# Allegro board Circuit for sensors.brd
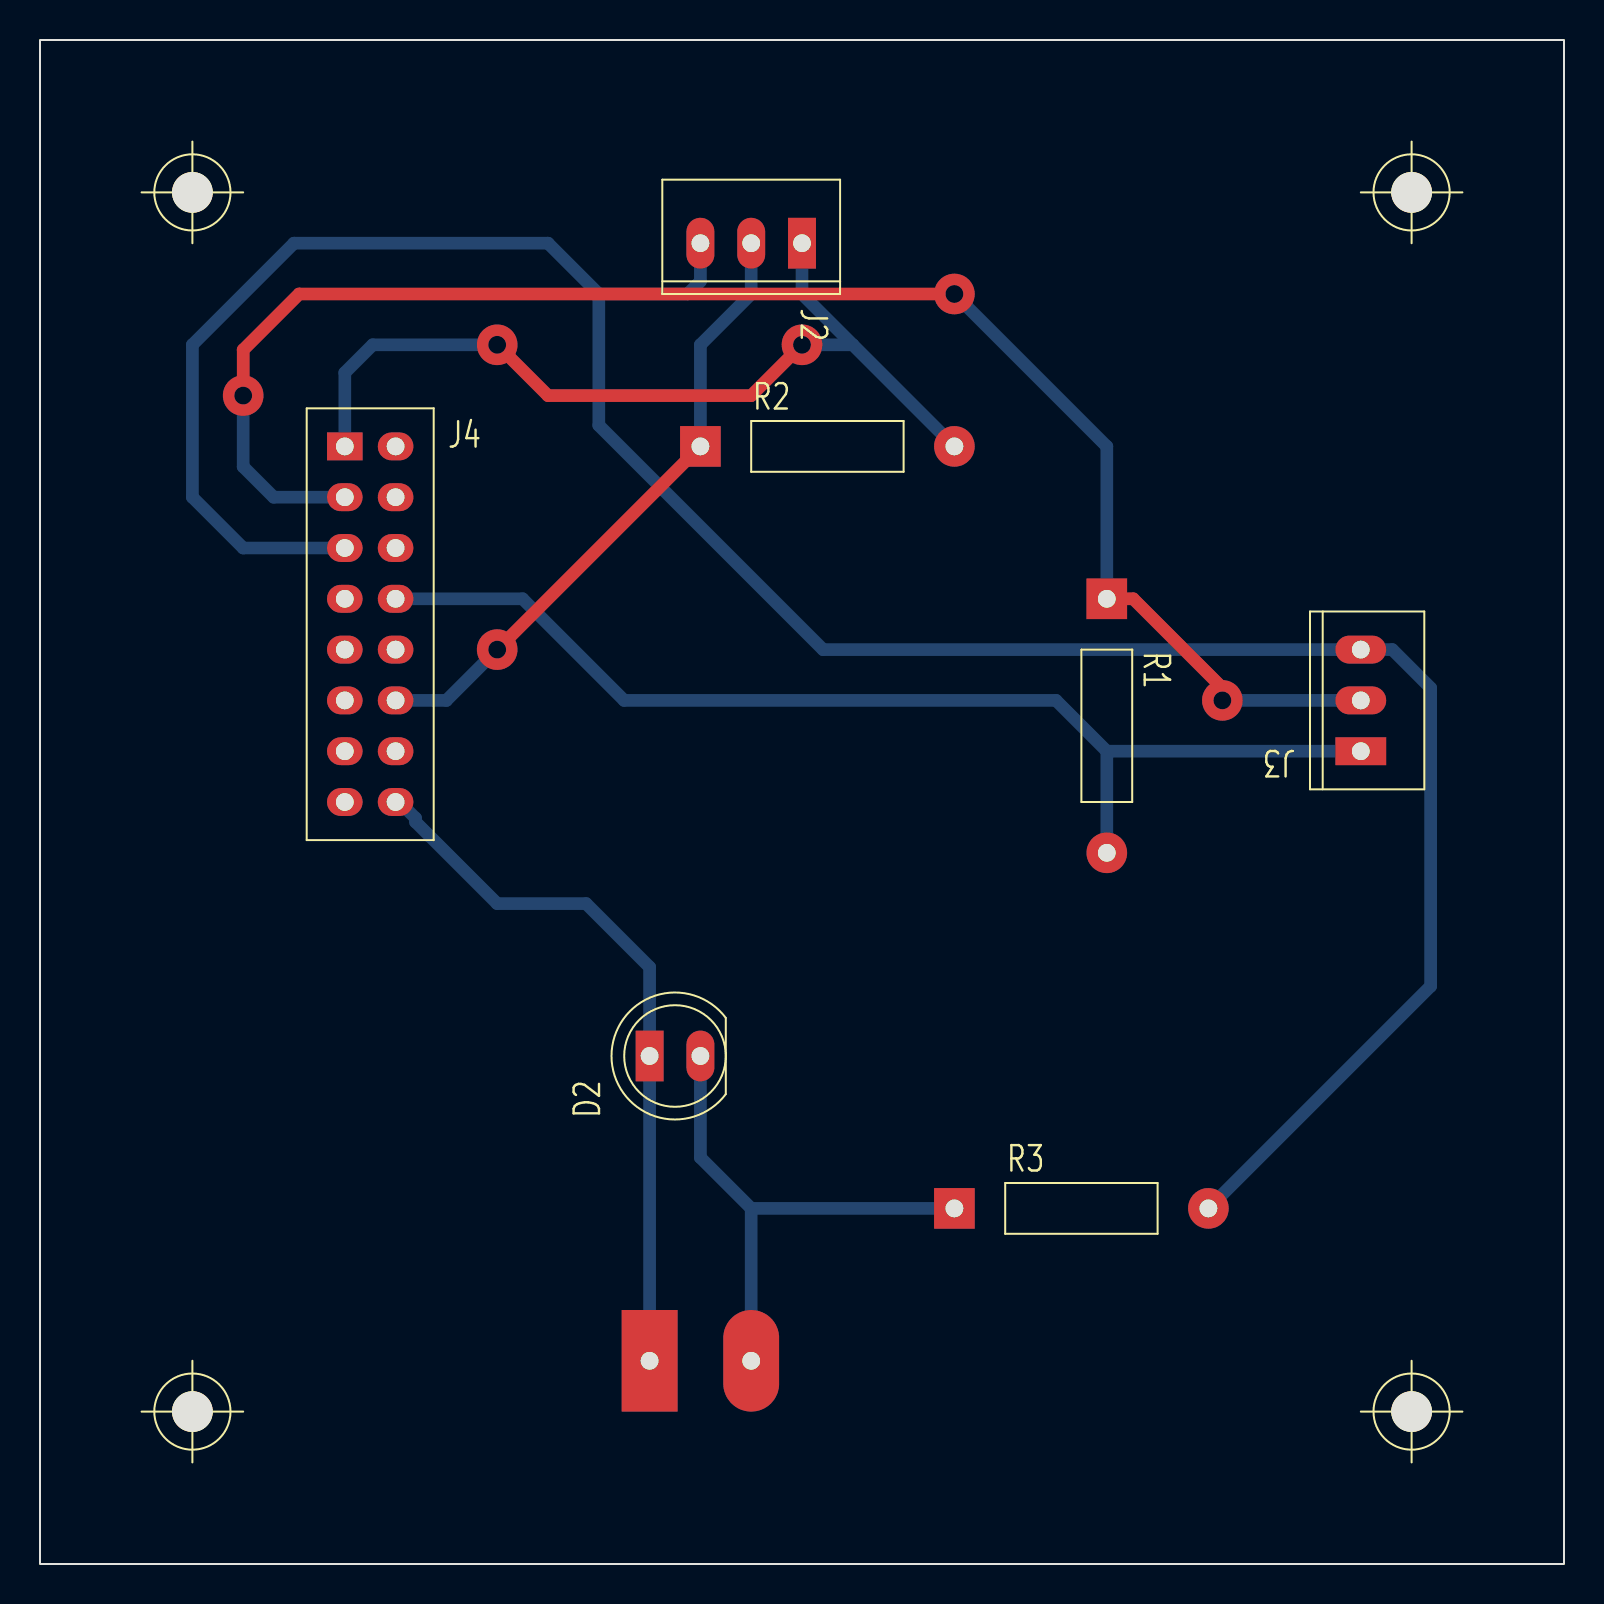
[diagram p0: board, top side]
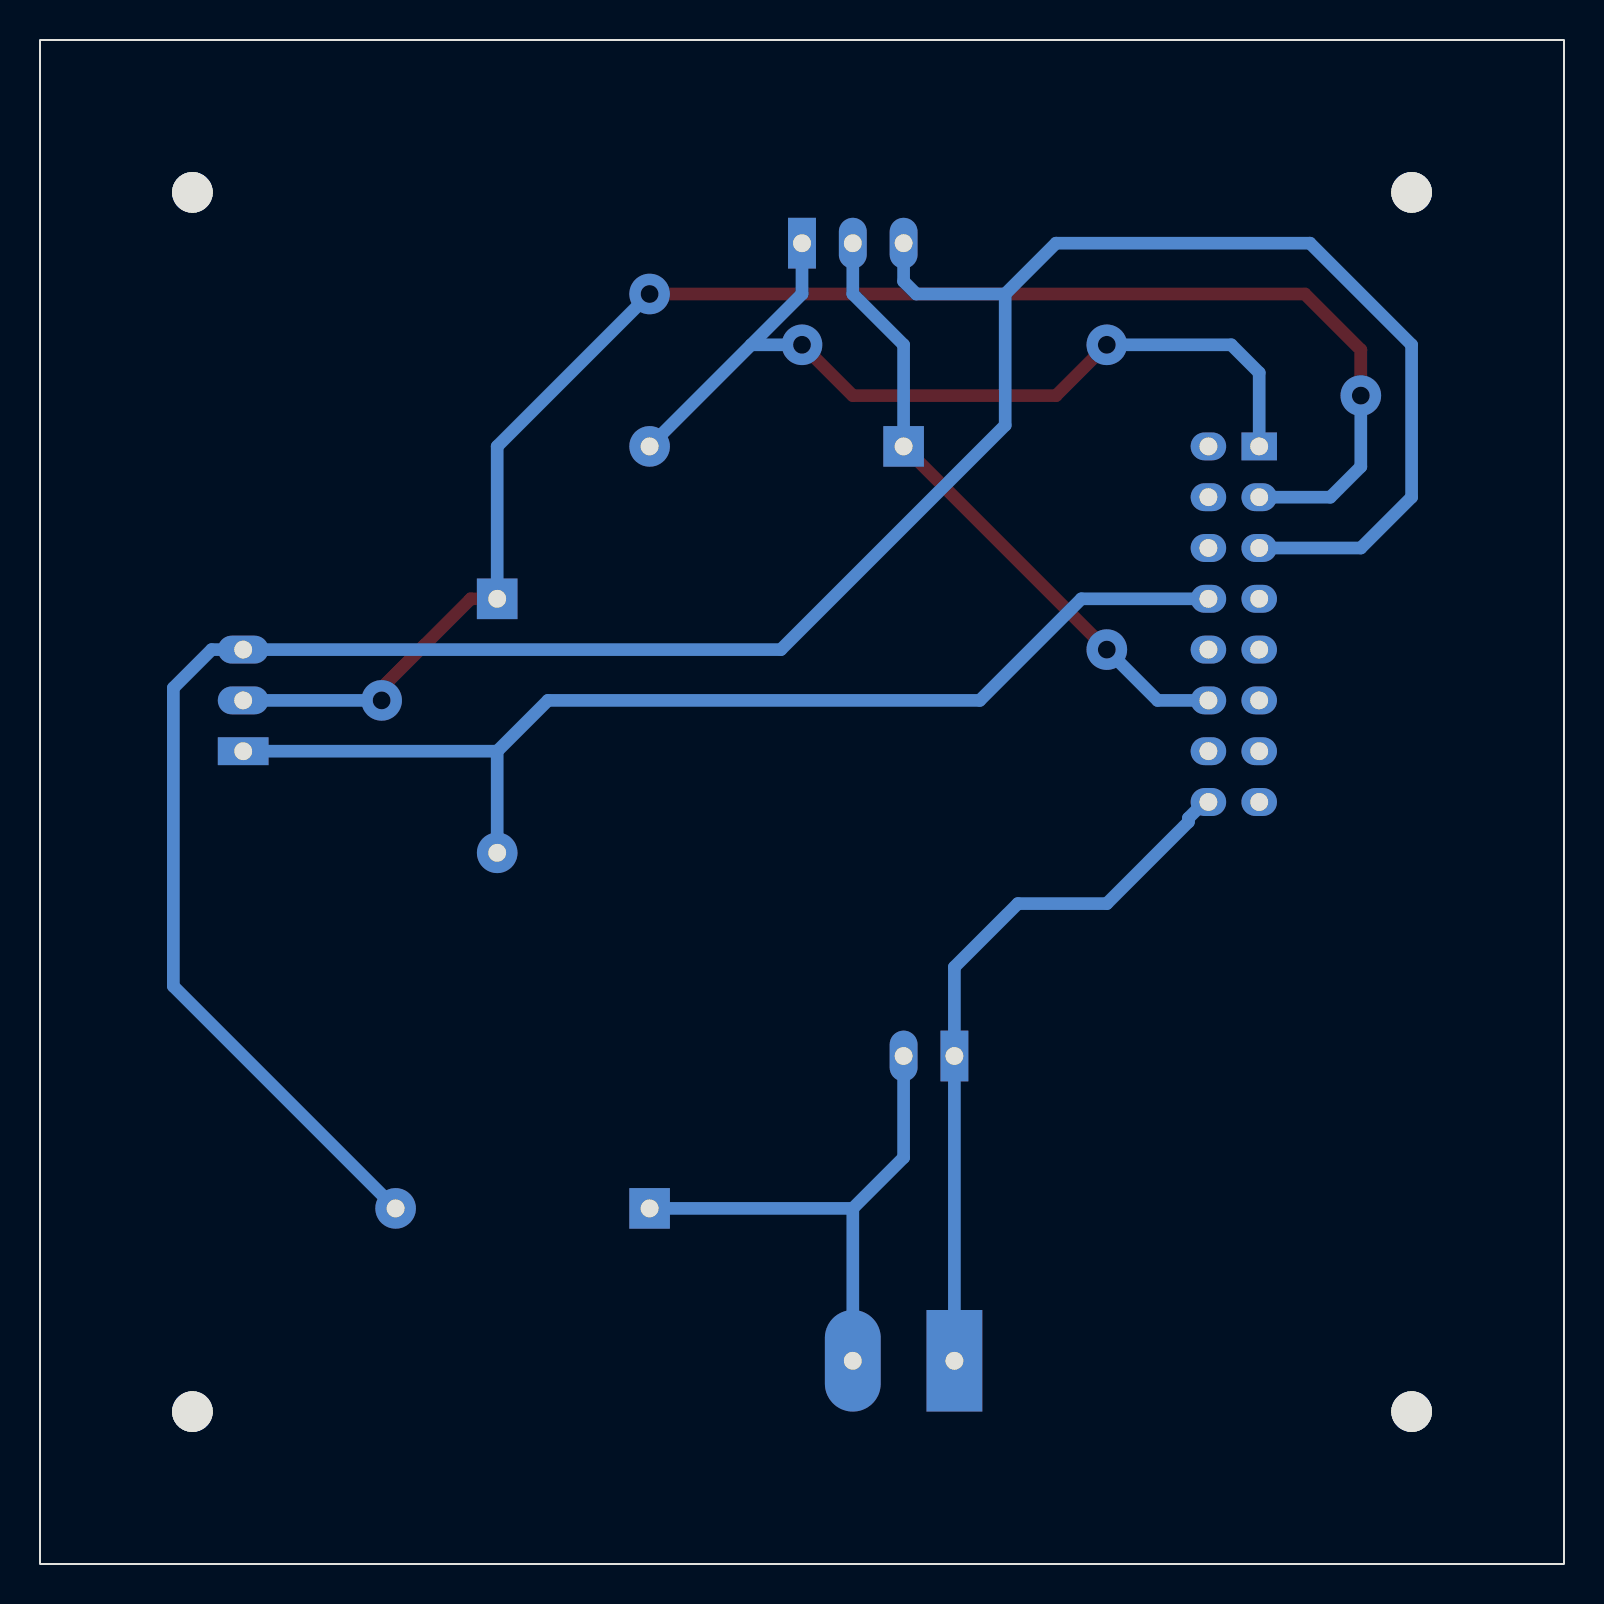
[diagram p1: board, bottom side, seen from below]

Outline 76.2 x 76.2 mm; copper layers: TOP, BOTTOM. Coordinates in mm from the lower left corner of the outline.
Outline path: rectangle 0,0 76.2,76.2

## Design rules (mm)
constraint set DEFAULT: min track width 0.635

## Placement (name value [footprint] x y rotation side)
D1  LED  [GU-TERMINAL2-200]  30.48 10.16 90 top
D2  LED  [GU-LED5MM]  30.48 25.4 90 top
J2  HEADER 3  [GU-MOLEX3]  38.1 66.04 270 top
J3  HEADER 3  [GU-MOLEX3]  66.04 40.64 180 top
J4  HEADER 8X2  [GU-HEADER16]  15.24 55.88 0 top
NOREF  -  [unnamed]  68.58 68.58 0 top
NOREF#2  -  [unnamed]  7.62 68.58 0 top
NOREF#3  -  [unnamed]  68.58 7.62 0 top
NOREF#4  -  [unnamed]  7.62 7.62 0 top
R1  RESISTOR  [GU-RC500]  53.34 48.26 270 top
R2  RESISTOR  [GU-RC500]  33.02 55.88 0 top
R3  RESISTOR  [GU-RC500]  45.72 17.78 0 top

## Library data of the parts
D1 = LED: User Part Number: TERMINAL2-200
D2 = LED
J2 J3 = HEADER 3
J4 = HEADER 8X2
R1-R3 = RESISTOR

## Footprints (pads in the part's own frame, mm; a bottom-side part is the same pattern mirrored in y, then rotated)
GU-HEADER16
  rect 1.778x1.397 hole 0.889: 1(0,0)
  oval 1.778x1.397 hole 0.889: 2(2.54,0) 3(0,-2.54) 4(2.54,-2.54) 5(0,-5.08) 6(2.54,-5.08) 7(0,-7.62) 8(2.54,-7.62) 9(0,-10.16) 10(2.54,-10.16) 11(0,-12.7) 12(2.54,-12.7) 13(0,-15.24) 14(2.54,-15.24) 15(0,-17.78) 16(2.54,-17.78)
GU-LED5MM
  rect 2.54x1.397 hole 0.889: 1(0,0)
  oval 2.54x1.397 hole 0.889: 2(0,-2.54)
GU-MOLEX3
  rect 2.54x1.397 hole 0.889: 1(0,0)
  oval 2.54x1.397 hole 0.889: 2(0,-2.54) 3(0,-5.08)
GU-RC500
  rect 2.032x2.032 hole 0.889: 1(0,0)
  round 2.032 hole 0.889: 2(12.7,0)
GU-TERMINAL2-200
  rect 5.08x2.794 hole 0.889: 1(0,0)
  oval 5.08x2.794 hole 0.889: 2(0,-5.08)
unnamed
  round 2.032 hole 3.962 unplated: (0,0)

## Nets
GND: J2.3 J3.3 J4.5 R3.2
N02271: J2.1 J4.1 R2.2
N02364: J2.2 J4.12 R2.1
N02415: J3.2 J4.3 R1.1
N02433: J3.1 J4.8 R1.2
N02506: D1.2(CATHODE) D2.2(CATHODE) R3.1
N04214: D1.1 D2.1 J4.16

Pads without a net: J4 2 4 6 7 9 10 11 13 14 15

## Via types
v1: diameter 2.032, hole 0.889, TOP to BOTTOM, 6 vias

## Routing (per net, layer and track width the routed paths; a pad name or vN(x,y) marks a point on that pad's centre or on a via; arc(x,y) is an arc through that point)
GND: length 131.2
  BOTTOM w0.635: 27.94,63.5 27.94,56.94 39.16,45.72 J3.3 67.61,45.72 69.53,43.8 69.53,28.89 R3.2 ; 27.94,63.5 32.39,63.5 33.02,64.14 J2.3 ; 27.94,63.5 25.4,66.04 12.7,66.04 7.62,60.96 7.62,53.34 10.16,50.8 J4.5
N02271: length 45.1
  TOP w0.635: v1(38.1,60.96) 35.56,58.42 25.4,58.42 v1(22.86,60.96)
  BOTTOM w0.635: v1(22.86,60.96) 16.64,60.96 15.24,59.56 J4.1 ; J2.1 38.1,63.5 40.64,60.96 ; 40.64,60.96 R2.2 ; 40.64,60.96 v1(38.1,60.96)
N02364: length 31.7
  TOP w0.635: R2.1 v1(22.86,45.72)
  BOTTOM w0.635: J4.12 20.32,43.18 v1(22.86,45.72) ; R2.1 33.02,60.96 35.56,63.5 J2.2
N02415: length 81.8
  TOP w0.635: v1(45.72,63.5) 12.95,63.5 10.16,60.71 v1(10.16,58.42) ; R1.1 54.66,48.26 59.12,43.8 v1(59.12,43.18)
  BOTTOM w0.635: v1(45.72,63.5) 53.34,55.88 R1.1 ; J3.2 v1(59.12,43.18) ; v1(10.16,58.42) 10.16,54.86 11.68,53.34 J4.3
N02433: length 56.5
  BOTTOM w0.635: R1.2 53.34,40.64 ; 53.34,40.64 J3.1 ; 53.34,40.64 50.8,43.18 29.21,43.18 24.13,48.26 J4.8
N02506: length 26.5
  BOTTOM w0.635: 35.56,17.78 33.02,20.32 D2.2 ; 35.56,17.78 R3.1 ; 35.56,17.78 D1.2
N04214: length 35.9
  BOTTOM w0.635: J4.16 17.97,38.1 18.78,37.29 18.78,37.1 22.86,33.02 27.3,33.02 30.48,29.84 D2.1 D1.1
